# EAGLE board ads1298schield (EAGLE 7.2.0)

Size 160 x 100 mm. Coordinates in mm from the lower left corner, seen from the top.
Outline: 0,0 160,0 160,100 0,100 0,0
Copper layers (1*16): Top 0.035mm / dielectric 1.5mm / Bottom 0.035mm
Design rules "default": minimum track width 10mil, minimum drill 24mil, track to track 8mil, track to pad 8mil, pad to pad 8mil, via to via 8mil, smd to smd 8mil, copper to edge 40mil, drill to drill 8mil, minimum pad ring 10mil, minimum via ring 8mil, stop-mask expansion 4mil, vias tented up to drill 0mil, thermal gap 10mil

## Footprints (pad centres in the part's own frame; a part is rotated, then mirrored left to right if it is on the bottom)
C1608 = smd 1.1 x 1: 1 -0.85,0; 2 0.85,0
C0603 = smd 1.1 x 1: 1 -0.85,0; 2 0.85,0
0402-CAP = smd 0.7 x 0.9: 1 -0.65,0; 2 0.65,0
EIA3216 = smd 1.4 x 1.6: A 1.4,0; C -1.4,0
0603-CAP = smd 1.1 x 1: 1 -0.85,0; 2 0.85,0
1210 = smd 1.2 x 2: 1 -1.6,0; 2 1.6,0
C1210 = smd 1.6 x 2.7: 1 -1.4,0; 2 1.4,0
SOD323_ST = smd 0.8 x 0.6: A 1.25,0; C -1.25,0
MELF-MLL41 = smd 2.5 x 3: A 2.625,0; C -2.625,0
LED-0603 = smd 0.8 x 0.8: A 0,-0.75; C 0,0.75
SOT23-6-HAND = smd 2.591 x 0.559: 1 -1.651,1.016; 2 -1.651,0; 3 -1.651,-1.016; 4 1.651,-1.016; 5 1.651,0; 6 1.651,1.016
P-HVQFN48-7X7 = smd 0.8 x 0.35: 1 -3.325,2.75; 2 -3.325,2.25; 3 -3.325,1.75; 4 -3.325,1.25; 5 -3.325,0.75; 6 -3.325,0.25; 7 -3.325,-0.25; 8 -3.325,-0.75; 9 -3.325,-1.25; 10 -3.325,-1.75; 11 -3.325,-2.25; 12 -3.325,-2.75; 25 3.325,-2.75; 26 3.325,-2.25; 27 3.325,-1.75; 28 3.325,-1.25; 29 3.325,-0.75; 30 3.325,-0.25; 31 3.325,0.25; 32 3.325,0.75; 33 3.325,1.25; 34 3.325,1.75; 35 3.325,2.25; 36 3.325,2.75 | smd 0.35 x 0.8: 13 -2.75,-3.325; 14 -2.25,-3.325; 15 -1.75,-3.325; 16 -1.25,-3.325; 17 -0.75,-3.325; 18 -0.25,-3.325; 19 0.25,-3.325; 20 0.75,-3.325; 21 1.25,-3.325; 22 1.75,-3.325; 23 2.25,-3.325; 24 2.75,-3.325; 37 2.75,3.325; 38 2.25,3.325; 39 1.75,3.325; 40 1.25,3.325; 41 0.75,3.325; 42 0.25,3.325; 43 -0.25,3.325; 44 -0.75,3.325; 45 -1.25,3.325; 46 -1.75,3.325; 47 -2.25,3.325; 48 -2.75,3.325
22-23-2091 = drill 1 long: 1 -10.16,0; 2 -7.62,0; 3 -5.08,0; 4 -2.54,0; 5 0,0; 6 2.54,0; 7 5.08,0; 8 7.62,0; 9 10.16,0
JST-2-SMD = smd 1 x 4.6: 1 -1,-3.7; 2 1,-3.7 | smd 1.6 x 3.4: NC1 -3.4,1.5; NC2 3.4,1.5
2X12 = drill 1.016 pad 1.676 octagon: 1 -12.7,1.27; 2 -12.7,3.81; 3 -10.16,1.27; 4 -10.16,3.81; 5 -7.62,1.27; 6 -7.62,3.81; 7 -5.08,1.27; 8 -5.08,3.81; 9 -2.54,1.27; 10 -2.54,3.81; 11 0,1.27; 12 0,3.81; 13 2.54,1.27; 14 2.54,3.81; 15 5.08,1.27; 16 5.08,3.81; 17 7.62,1.27; 18 7.62,3.81; 19 10.16,1.27; 20 10.16,3.81; 21 12.7,1.27; 22 12.7,3.81; 23 15.24,1.27; 24 15.24,3.81
1X04 = drill 1.016 long: 1 -3.81,0; 2 -1.27,0; 3 1.27,0; 4 3.81,0
1210-HAND = smd 1.8 x 2.794: 1 -1.499,0; 2 1.499,0
TO252 = smd 1 x 1.6: 1 -2.28,-4.8; 2 2.28,-4.8 | smd 5.4 x 6.2: 3 0,2.5
1206-HAND = smd 1.8 x 1.803: 1 -1.499,0; 2 1.499,0
M1406 = smd 1.4 x 1.8: 1 -1.7,0; 2 1.7,0
0603-RES = smd 1.1 x 1: 1 -0.85,0; 2 0.85,0
0402-RES = smd 0.7 x 0.9: 1 -0.65,0; 2 0.65,0
SWITCH-TACT-B3U-1100P-B = smd 1 x 1.9: 1 -1.75,0; 2 1.75,0 | smd 0.8 x 1.1: BOSS 0,1.75 | hole 0.762: 0,0
SOT23-5 = smd 0.55 x 1.2: 1 -0.95,-1.3; 2 0,-1.3; 3 0.95,-1.3; 4 0.95,1.3; 5 -0.95,1.3
SOP50P490X110-10N = smd 1.397 x 0.279: 1 -2.184,0.991; 2 -2.184,0.508; 3 -2.184,0; 4 -2.184,-0.508; 5 -2.184,-0.991; 6 2.184,-0.991; 7 2.184,-0.508; 8 2.184,0; 9 2.184,0.508; 10 2.184,0.991
RN41 = smd 0.8 x 1.6: 1 -6.6,-6.6; 2 -5.4,-6.6; 3 -4.2,-6.6; 4 -3,-6.6; 5 -1.8,-6.6; 6 -0.6,-6.6; 7 0.6,-6.6; 8 1.8,-6.6; 9 3,-6.6; 10 4.2,-6.6; 11 5.4,-6.6; 12 6.6,-6.6; 13 6.6,6.6; 14 5.4,6.6; 15 4.2,6.6; 16 3,6.6; 17 1.8,6.6; 18 0.6,6.6; 19 -0.6,6.6; 20 -1.8,6.6; 21 -3,6.6; 22 -4.2,6.6; 23 -5.4,6.6; 24 -6.6,6.6 | smd 1.6 x 0.8: 28 9.4,3.1; 29 9.4,-3.1; 30 9.4,-4.122; 31 9.4,-1.9; 32 9.4,-0.7; 33 9.4,0.7; 34 9.4,1.9; 35 9.4,4.122
TQFP64 = smd 1.5 x 0.285: 1 -5.85,3.75; 2 -5.85,3.25; 3 -5.85,2.75; 4 -5.85,2.25; 5 -5.85,1.75; 6 -5.85,1.25; 7 -5.85,0.75; 8 -5.85,0.25; 9 -5.85,-0.25; 10 -5.85,-0.75; 11 -5.85,-1.25; 12 -5.85,-1.75; 13 -5.85,-2.25; 14 -5.85,-2.75; 15 -5.85,-3.25; 16 -5.85,-3.75; 33 5.85,-3.75; 34 5.85,-3.25; 35 5.85,-2.75; 36 5.85,-2.25; 37 5.85,-1.75; 38 5.85,-1.25; 39 5.85,-0.75; 40 5.85,-0.25; 41 5.85,0.25; 42 5.85,0.75; 43 5.85,1.25; 44 5.85,1.75; 45 5.85,2.25; 46 5.85,2.75; 47 5.85,3.25; 48 5.85,3.75 | smd 0.285 x 1.5: 17 -3.75,-5.85; 18 -3.25,-5.85; 19 -2.75,-5.85; 20 -2.25,-5.85; 21 -1.75,-5.85; 22 -1.25,-5.85; 23 -0.75,-5.85; 24 -0.25,-5.85; 25 0.25,-5.85; 26 0.75,-5.85; 27 1.25,-5.85; 28 1.75,-5.85; 29 2.25,-5.85; 30 2.75,-5.85; 31 3.25,-5.85; 32 3.75,-5.85; 49 3.75,5.85; 50 3.25,5.85; 51 2.75,5.85; 52 2.25,5.85; 53 1.75,5.85; 54 1.25,5.85; 55 0.75,5.85; 56 0.25,5.85; 57 -0.25,5.85; 58 -0.75,5.85; 59 -1.25,5.85; 60 -1.75,5.85; 61 -2.25,5.85; 62 -2.75,5.85; 63 -3.25,5.85; 64 -3.75,5.85
LQFP64 = smd 0.3 x 1.2: 1 -3.75,-5.75; 2 -3.25,-5.75; 3 -2.75,-5.75; 4 -2.25,-5.75; 5 -1.75,-5.75; 6 -1.25,-5.75; 7 -0.75,-5.75; 8 -0.25,-5.75; 9 0.25,-5.75; 10 0.75,-5.75; 11 1.25,-5.75; 12 1.75,-5.75; 13 2.25,-5.75; 14 2.75,-5.75; 15 3.25,-5.75; 16 3.75,-5.75; 33 3.75,5.75; 34 3.25,5.75; 35 2.75,5.75; 36 2.25,5.75; 37 1.75,5.75; 38 1.25,5.75; 39 0.75,5.75; 40 0.25,5.75; 41 -0.25,5.75; 42 -0.75,5.75; 43 -1.25,5.75; 44 -1.75,5.75; 45 -2.25,5.75; 46 -2.75,5.75; 47 -3.25,5.75; 48 -3.75,5.75 | smd 1.2 x 0.3: 17 5.75,-3.75; 18 5.75,-3.25; 19 5.75,-2.75; 20 5.75,-2.25; 21 5.75,-1.75; 22 5.75,-1.25; 23 5.75,-0.75; 24 5.75,-0.25; 25 5.75,0.25; 26 5.75,0.75; 27 5.75,1.25; 28 5.75,1.75; 29 5.75,2.25; 30 5.75,2.75; 31 5.75,3.25; 32 5.75,3.75; 49 -5.75,3.75; 50 -5.75,3.25; 51 -5.75,2.75; 52 -5.75,2.25; 53 -5.75,1.75; 54 -5.75,1.25; 55 -5.75,0.75; 56 -5.75,0.25; 57 -5.75,-0.25; 58 -5.75,-0.75; 59 -5.75,-1.25; 60 -5.75,-1.75; 61 -5.75,-2.25; 62 -5.75,-2.75; 63 -5.75,-3.25; 64 -5.75,-3.75
SOT23-5' = smd 0.5 x 1: 1 -0.95,-1.2; 2 0,-1.2; 3 0.95,-1.2; 4 0.95,1.2; 5 -0.95,1.2
SDBMF-009XXBXX2 = smd 1.2 x 4.3: 1 6.7,5.325; 2 4.2,5.325; 3 1.7,5.325; 4 -0.8,5.325; 5 -3.3,5.325; 6 -5.8,5.325; 7 -8.3,5.325; 8 -9.925,5.325 | smd 1.2 x 2: 9 9.2,4.175 | smd 2.1 x 2.4: M1 -13.4,-2 | smd 2.6 x 2.9: M2 13.4,-5.35 | smd 1.3 x 1.9: M3 -13.6,17.4; M4 13.8,16.95; M5 13.8,21.3 | smd 1.4 x 1.95: SW1 -11.9,22.7; SW3 -13.7,22.7 | smd 2.1 x 2.2: SW2 -13.4,-4.75 | hole 1.4: -11.9,0; 12.1,0
USB-MICROB = smd 0.35 x 1.4: D+ 0,2.65; D- -0.65,2.65; GND 1.3,2.65; ID 0.65,2.65; VBUS -1.3,2.65 | smd 1.8 x 1.9: MT1 -4,0; MT2 4,0
91SMX = smd 4.1 x 4.1: 1 -4,0; 2 4,0

## Placement (x,y rotation side)
C1  1uF  [C1608]  -31.75,96.52 0 top  (outside the outline)
C2  100nF  [C0603]  -26.67,96.52 0 top  (outside the outline)
C3  4.7uF  [0402-CAP]  -60.96,109.22 0 top  (outside the outline)
C4  4.7uF  [0402-CAP]  -64.77,109.22 0 top  (outside the outline)
C5  4.7uF  [EIA3216]  -45.72,95.25 0 top  (outside the outline)
C6  10uF  [EIA3216]  -52.07,95.25 0 top  (outside the outline)
C7  1uF  [0603-CAP]  -57.15,95.25 0 top  (outside the outline)
C8  0.1uF  [0603-CAP]  -60.96,95.25 0 top  (outside the outline)
C9  1uF  [0603-CAP]  -64.77,95.25 0 top  (outside the outline)
C10  0.1uF  [0603-CAP]  -68.58,95.25 0 top  (outside the outline)
C11  1uF  [0603-CAP]  -72.39,95.25 0 top  (outside the outline)
C12  0.1uF  [0603-CAP]  -76.2,95.25 0 top  (outside the outline)
C13  1uF  [0603-CAP]  -80.01,95.25 0 top  (outside the outline)
C14  0.1uF  [0603-CAP]  -83.82,95.25 0 top  (outside the outline)
C15  10uF  [1210]  -85.09,109.22 0 top  (outside the outline)
C16  1.5nF  [1210]  -90.17,109.22 0 top  (outside the outline)
C17  100uF  [1210]  -15.24,113.03 0 top  (outside the outline)
C18  1uF  [0603-CAP]  -87.63,95.25 0 top  (outside the outline)
C19  1uF  [0603-CAP]  -91.44,95.25 0 top  (outside the outline)
C20  0.1uF  [0603-CAP]  -15.24,101.6 0 top  (outside the outline)
C21  1uF  [0603-CAP]  -19.05,101.6 0 top  (outside the outline)
C22  1uF  [0603-CAP]  -22.86,101.6 0 top  (outside the outline)
C23  1uF  [0603-CAP]  -26.67,101.6 0 top  (outside the outline)
C24  22uF  [1210]  -20.32,113.03 0 top  (outside the outline)
C25  100uF  [1210]  -25.4,113.03 0 top  (outside the outline)
C26  100nF  [C1210]  -78.74,73.66 0 top  (outside the outline)
C27  1uF  [0402-CAP]  -68.58,109.22 0 top  (outside the outline)
C28  10uF  [0603-CAP]  -30.48,101.6 0 top  (outside the outline)
C29  1uF  [0603-CAP]  -34.29,101.6 0 top  (outside the outline)
C30  1uF  [0603-CAP]  -38.1,101.6 0 top  (outside the outline)
C31  220pF  [0603-CAP]  -41.91,101.6 0 top  (outside the outline)
C32  10uF  [0603-CAP]  -45.72,101.6 0 top  (outside the outline)
C33  4.7pF  [0603-CAP]  -49.53,101.6 0 top  (outside the outline)
C34  4.7nF  [0603-CAP]  -53.34,101.6 0 top  (outside the outline)
C35  4.7nF  [0603-CAP]  -57.15,101.6 0 top  (outside the outline)
C36  4.7nF  [0603-CAP]  -60.96,101.6 0 top  (outside the outline)
C37  4.7nF  [0603-CAP]  -64.77,101.6 0 top  (outside the outline)
C38  4.7nF  [0603-CAP]  -68.58,101.6 0 top  (outside the outline)
C39  4.7nF  [0603-CAP]  -72.39,101.6 0 top  (outside the outline)
C40  4.7nF  [0603-CAP]  -76.2,101.6 0 top  (outside the outline)
C41  4.7nF  [0603-CAP]  -80.01,101.6 0 top  (outside the outline)
C42  4.7nF  [0603-CAP]  -83.82,101.6 0 top  (outside the outline)
C43  4.7nF  [0603-CAP]  -87.63,101.6 0 top  (outside the outline)
C44  4.7nF  [0603-CAP]  -91.44,101.6 0 top  (outside the outline)
C45  4.7nF  [0603-CAP]  -15.24,105.41 0 top  (outside the outline)
C46  4.7nF  [0603-CAP]  -19.05,105.41 0 top  (outside the outline)
C47  4.7nF  [0603-CAP]  -22.86,105.41 0 top  (outside the outline)
C48  4.7nF  [0603-CAP]  -26.67,105.41 0 top  (outside the outline)
C49  4.7nF  [0603-CAP]  -30.48,105.41 0 top  (outside the outline)
C50  4.7pF  [0603-CAP]  -34.29,105.41 0 top  (outside the outline)
C51  1uF  [0603-CAP]  -38.1,105.41 0 top  (outside the outline)
C52  1uF  [0603-CAP]  -41.91,105.41 0 top  (outside the outline)
C53  1uF  [0603-CAP]  -45.72,105.41 0 top  (outside the outline)
C58  100nF  [C1210]  -85.09,73.66 0 top  (outside the outline)
C59  100nF  [C1210]  -91.44,73.66 0 top  (outside the outline)
C60  100nF  [C1210]  -16.51,82.55 0 top  (outside the outline)
C61  4.7uF  [C1210]  -29.21,82.55 0 top  (outside the outline)
C62  4.7nF  [0603-CAP]  -49.53,105.41 0 top  (outside the outline)
C63  0.1uF  [0603-CAP]  -53.34,105.41 0 top  (outside the outline)
C64  100nF  [C1210]  -22.86,82.55 0 top  (outside the outline)
C66  0.01uF  [0603-CAP]  -57.15,105.41 0 top  (outside the outline)
D1  BAT60J  [SOD323_ST]  -19.05,96.52 0 top  (outside the outline)
D2  0  [MELF-MLL41]  -74.93,82.55 0 top  (outside the outline)
D4  red  [LED-0603]  -30.48,113.03 0 top  (outside the outline)
IC1  MCP1640SOT23-6-HAND  [SOT23-6-HAND]  -31.75,73.66 0 top  (outside the outline)
IC2  ADS1258  [P-HVQFN48-7X7]  -49.53,49.53 0 top  (outside the outline)
J1  22-23-2091  [22-23-2091]  -66.04,49.53 0 top  (outside the outline)
JP1  LiPo  [JST-2-SMD]  -76.2,64.77 0 top  (outside the outline)
JP16  Electrodes  [2X12]  -57.15,60.96 0 top  (outside the outline)
JP58  SWD header  [1X04]  -38.1,82.55 0 top  (outside the outline)
L1  4.7uH  [1210-HAND]  -57.15,82.55 0 top  (outside the outline)
L2  4.7uH  [1210-HAND]  -62.23,82.55 0 top  (outside the outline)
L3  6.8uH  [1210-HAND]  -67.31,82.55 0 top  (outside the outline)
Q1  FDD4141TO252  [TO252]  -48.26,6.35 0 top  (outside the outline)
R1  309k  [1206-HAND]  -67.31,90.17 0 top  (outside the outline)
R2  10k  [M1406]  -88.9,82.55 0 top  (outside the outline)
R3  10k  [M1406]  -16.51,90.17 0 top  (outside the outline)
R4  10k  [M1406]  -22.86,90.17 0 top  (outside the outline)
R5  10k  [M1406]  -29.21,90.17 0 top  (outside the outline)
R6  3.98K  [0603-RES]  -60.96,105.41 0 top  (outside the outline)
R7  10k  [M1406]  -35.56,90.17 0 top  (outside the outline)
R8  10k  [M1406]  -41.91,90.17 0 top  (outside the outline)
R9  10k  [M1406]  -48.26,90.17 0 top  (outside the outline)
R10  10k  [M1406]  -54.61,90.17 0 top  (outside the outline)
R11  470  [0402-RES]  -72.39,109.22 0 top  (outside the outline)
R12  2k  [0402-RES]  -76.2,109.22 0 top  (outside the outline)
R13  976k  [1206-HAND]  -72.39,90.17 0 top  (outside the outline)
R14  309k  [1206-HAND]  -77.47,90.17 0 top  (outside the outline)
R15  340k  [1206-HAND]  -82.55,90.17 0 top  (outside the outline)
R16  200k  [1206-HAND]  -87.63,90.17 0 top  (outside the outline)
R17  15k  [1206-HAND]  -92.71,90.17 0 top  (outside the outline)
R18  2k  [0402-RES]  -80.01,109.22 0 top  (outside the outline)
R19  1M  [0603-RES]  -64.77,105.41 0 top  (outside the outline)
R20  86.6k  [0603-RES]  -68.58,105.41 0 top  (outside the outline)
R21  10.2k  [0603-RES]  -72.39,105.41 0 top  (outside the outline)
R25  4.99k  [0603-RES]  -76.2,105.41 0 top  (outside the outline)
R27  10k  [M1406]  -60.96,90.17 0 top  (outside the outline)
R28  100k  [M1406]  -82.55,82.55 0 top  (outside the outline)
R34  4.99k  [0603-RES]  -80.01,105.41 0 top  (outside the outline)
R35  4.99k  [0603-RES]  -83.82,105.41 0 top  (outside the outline)
R36  4.99k  [0603-RES]  -87.63,105.41 0 top  (outside the outline)
R37  4.99k  [0603-RES]  -91.44,105.41 0 top  (outside the outline)
R38  4.99k  [0603-RES]  -15.24,109.22 0 top  (outside the outline)
R39  4.99k  [0603-RES]  -19.05,109.22 0 top  (outside the outline)
R40  4.99k  [0603-RES]  -22.86,109.22 0 top  (outside the outline)
R41  4.99k  [0603-RES]  -26.67,109.22 0 top  (outside the outline)
R42  4.99k  [0603-RES]  -30.48,109.22 0 top  (outside the outline)
R43  4.99k  [0603-RES]  -34.29,109.22 0 top  (outside the outline)
R44  4.99k  [0603-RES]  -38.1,109.22 0 top  (outside the outline)
R45  4.99k  [0603-RES]  -41.91,109.22 0 top  (outside the outline)
R46  4.99k  [0603-RES]  -45.72,109.22 0 top  (outside the outline)
R47  4.99k  [0603-RES]  -49.53,109.22 0 top  (outside the outline)
R48  4.99k  [0603-RES]  -53.34,109.22 0 top  (outside the outline)
R49  4.99k  [0603-RES]  -57.15,109.22 0 top  (outside the outline)
SW3  !RST  [SWITCH-TACT-B3U-1100P-B]  -40.64,95.25 0 top  (outside the outline)
U1  MCP73831  [SOT23-5]  -35.56,95.25 0 top  (outside the outline)
U2  LTC3440EMSPBF  [SOP50P490X110-10N]  -35.56,63.5 0 top  (outside the outline)
U$1  BLUETOOTH-RN41"  [RN41]  -64.77,7.62 0 top  (outside the outline)
U$2  ADS1298*PAG*  [TQFP64]  -20.32,50.8 0 top  (outside the outline)
U$3  STM32F411RE  [LQFP64]  -38.1,50.8 0 top  (outside the outline)
U$4  LMR62421  [SOT23-5']  -72.39,73.66 0 top  (outside the outline)
X1  SDBMF  [SDBMF-009XXBXX2]  -27.94,17.78 0 top  (outside the outline)
X2  USB-MICROB  [USB-MICROB]  -49.53,82.55 0 top  (outside the outline)
X3  CRYSTALS-NOGND-91SMX  [91SMX]  -57.15,73.66 0 top  (outside the outline)

## Library data of the parts
C1 C2 C26 C58-C61 C64 R2-R5 R7-R10 = rcl
C3 C4 C27 D4 JP1 R11 R12 R18 U1 U$1 X2 = SparkFun
C5 C6 IC1 L1-L3 R1 R13-R17 = SteveMarple
C7-C25 C28-C53 C62 C63 C66 R6 R19-R21 R25 R34-R49 = SparkFun-Passives
D1 D2 = diode
IC2 = mfePCB
J1 = con-molex; MF: MOLEX; MPN: 22-23-2091; OC_FARNELL: 1756827; OC_NEWARK: 56H0450
JP16 = headers
JP58 = pinhead
Q1 = transistor-fet
R27 R28 = resistor
SW3 = stm32f4stamp
U2 = LTC; MPN: LTC3440EMS#PBF; OC_FARNELL: 1273938; OC_NEWARK: 73K4393; PACKAGE: MSOP-10; SUPPLIER: Linear Technology
U$2 = ADS129x
U$3 = micro-stm_v3
U$4 = mfePCB; MPN: LMR62421
X1 = farnell
X3 = IQD-Frequency-Products

## Nets
5VIN: C3.1 D1.A D4.A Q1.1 R18.1 U1.4 X2.VBUS
4630ACCX: IC2.4 J1.4
4630ACCY: IC2.3 J1.5
4630ACCZ: IC2.2 J1.6
!DRDY1258: IC2.25 U$3.34
!DRDY1298: U$2.47 U$3.38
!PWDN1258: IC2.10 U$3.24
!PWDN1298: U$2.35 U$3.57
!RESET1258: IC2.11 U$3.36
!RESET1298: U$2.36 U$3.58
!SPI_CS1258: IC2.27 U$3.33
!SPI_CS1298: U$2.39 U$3.20
+3V3: C1.1 C2.1 C13.1 C14.1 C24.1 C25.1 C26.1 C52.1 C58.1 C59.1 C60.1 C63.1 IC2.28 JP58.1 R2.1 R3.1 R4.1 R5.1 R7.1 R8.1 R9.1 R10.1 R15.2 R28.2 U2.6 U$1.11 U$2.48 U$2.50 U$3.1 U$3.19 U$3.32 U$3.48 U$3.64 X1.4
+5V: C6.A C7.1 C8.1 C9.1 C10.1 C11.1 C12.1 C51.1 IC1.5 IC2.6 R13.2 U$2.19 U$2.21 U$2.22 U$2.54 U$2.56 U$2.59 U$2.60
+12V: C28.1 C31.1 D2.C J1.1 J1.2 J1.3 R20.2
AGND: C2.2 C3.2 C4.2 C5.C C6.C C7.2 C8.2 C9.2 C10.2 C11.2 C12.2 C13.2 C14.2 C15.2 C17.2 C18.2 C19.2 C20.2 C21.2 C22.2 C23.2 C24.2 C25.2 C26.2 C27.2 C28.2 C29.1 C29.2 C30.1 C30.2 C32.2 C33.2 C34.2 C35.1 C36.2 C37.1 C38.2 C39.1 C40.2 C41.1 C42.2 C43.1 C44.2 C45.1 C46.2 C47.1 C48.2 C49.1 C50.2 C51.2 C52.2 C53.2 C58.2 C59.2 C60.2 C61.2 C62.2 C63.2 C64.2 IC1.2 IC2.5 IC2.29 IC2.30 IC2.32 J1.7 J1.8 J1.9 JP1.2 JP16.5 JP58.2 R1.1 R12.2 R14.1 R16.1 R18.2 R21.1 R27.1 SW3.2 U1.2 U2.5 U$1.1 U$1.4 U$1.12 U$1.28 U$1.29 U$2.20 U$2.23 U$2.25 U$2.31 U$2.32 U$2.33 U$2.41 U$2.49 U$2.51 U$2.53 U$2.57 U$2.58 U$3.12 U$3.18 U$3.28 U$3.31 U$3.47 U$3.63 U$4.2 X1.3 X1.6 X2.GND
AIN1N: C35.2 R35.2 U$2.15
AIN1P: C34.1 R34.2 U$2.16
AIN2N: C37.2 R37.2 U$2.13
AIN2P: C36.1 R36.2 U$2.14
AIN3N: C39.2 R39.2 U$2.11
AIN3P: C38.1 R38.2 U$2.12
AIN4N: C41.2 R41.2 U$2.9
AIN4P: C40.1 R40.2 U$2.10
AIN5N: C43.2 R43.2 U$2.7
AIN5P: C42.1 R42.2 U$2.8
AIN6N: C45.2 R45.2 U$2.5
AIN6P: C44.1 R44.2 U$2.6
AIN7N: C47.2 R47.2 U$2.3
AIN7P: C46.1 R46.2 U$2.4
AIN8N: C49.2 R49.2 U$2.1
AIN8P: C48.1 R48.2 U$2.2
BIASINV: C66.2 JP16.3 R6.1 U$2.61
CLKSEL1258: IC2.12 U$3.39
CLKSEL1298: U$2.52 U$3.59
CMD: R9.2 X1.2
D0: R2.2 X1.7
IN1N: JP16.8 R35.1
IN1P: JP16.7 R34.1
IN2N: JP16.10 R37.1
IN2P: JP16.9 R36.1
IN3N: JP16.12 R39.1
IN3P: JP16.11 R38.1
IN4N: JP16.14 R41.1
IN4P: JP16.13 R40.1
IN5N: JP16.16 R43.1
IN5P: JP16.15 R42.1
IN6N: JP16.18 R45.1
IN6P: JP16.17 R44.1
IN7N: JP16.20 R47.1
IN7P: JP16.19 R46.1
IN8N: JP16.22 R49.1
IN8P: JP16.21 R48.1
LINK: U$1.15 U$1.16
N$1: R3.2 X1.1
N$2: R4.2 X1.8
N$3: C17.1 U$2.28
N$4: C18.1 U$2.30
N$5: C66.1 R6.2 U$2.62 U$2.63
N$6: R5.2 X1.9
N$7: R19.1 U$4.4
N$8: C21.1 U$2.26
N$9: R7.2 X1.SW1
N$10: R8.2 X1.SW2
N$11: C1.2 X1.SW3
N$12: C33.1 IC2.8 X3.2
N$13: C19.1 C20.1 U$2.55
N$14: D2.A L3.1 U$4.1
N$15: C50.1 IC2.9 X3.1
N$16: R12.1 U1.5
N$17: R11.1 U1.1
N$18: C31.2 R20.1 R21.2 U$4.3
N$19: R1.2 U2.1
N$20: D4.C R11.2
N$21: IC1.1 L1.2
N$23: C5.A IC1.3 IC1.6 L1.1
N$24: C16.1 U2.10
N$26: IC1.4 R13.1 R14.2
N$27: C15.1 U2.2 U2.7 U2.8
N$28: L2.1 U2.3
N$29: L2.2 U2.4
N$30: C53.1 IC2.31
N$31: R15.1 R16.2 R17.1 U2.9
N$32: C16.2 R17.2
N$87: C61.1 U$3.30
N$98: R27.2 U$3.60
N$99: C64.1 U$3.13
N$100: R28.1 SW3.1 U$3.7
REF_ELEC: C62.1 R25.1
REF_ELEC_CON: JP16.23 R25.2
RESET42: U$1.5 U$3.41
RX-TX42: U$1.14 U$3.43
SCK: R10.2 X1.5
SPI_CLK1258: IC2.22 U$3.29
SPI_CLK1298: U$2.40 U$3.21
SPI_MISO1258: IC2.24 U$3.10
SPI_MISO1298: U$2.43 U$3.22
SPI_MOSI1258: IC2.23 U$3.11
SPI_MOSI1298: U$2.34 U$3.23
START1258: IC2.26 U$3.35
START1298: U$2.38 U$3.37
SWCLK: JP58.3 U$3.49
SWDIO: JP58.4 U$3.46
TX-RX42: U$1.13 U$3.42
VBAT: C4.1 C27.1 C32.1 D1.C JP1.1 L3.2 Q1.2 Q1.3 R19.2 U1.3 U$4.5
VREFP: C22.1 C23.1 U$2.24

## Tracks (layer width: path | path; a pad name or v marks a point on that pad's centre or on a via)
5VIN  (6 unrouted)
4630ACCX  (1 unrouted)
4630ACCY  (1 unrouted)
4630ACCZ  (1 unrouted)
!DRDY1258  (1 unrouted)
!DRDY1298  (1 unrouted)
!PWDN1258  (1 unrouted)
!PWDN1298  (1 unrouted)
!RESET1258  (1 unrouted)
!RESET1298  (1 unrouted)
!SPI_CS1258  (1 unrouted)
!SPI_CS1298  (1 unrouted)
+3V3  (33 unrouted)
+5V  (17 unrouted)
+12V  (6 unrouted)
AGND  (106 unrouted)
AIN1N  (2 unrouted)
AIN1P  (2 unrouted)
AIN2N  (2 unrouted)
AIN2P  (2 unrouted)
AIN3N  (2 unrouted)
AIN3P  (2 unrouted)
AIN4N  (2 unrouted)
AIN4P  (2 unrouted)
AIN5N  (2 unrouted)
AIN5P  (2 unrouted)
AIN6N  (2 unrouted)
AIN6P  (2 unrouted)
AIN7N  (2 unrouted)
AIN7P  (2 unrouted)
AIN8N  (2 unrouted)
AIN8P  (2 unrouted)
BIASINV  (3 unrouted)
CLKSEL1258  (1 unrouted)
CLKSEL1298  (1 unrouted)
CMD  (1 unrouted)
D0  (1 unrouted)
IN1N  (1 unrouted)
IN1P  (1 unrouted)
IN2N  (1 unrouted)
IN2P  (1 unrouted)
IN3N  (1 unrouted)
IN3P  (1 unrouted)
IN4N  (1 unrouted)
IN4P  (1 unrouted)
IN5N  (1 unrouted)
IN5P  (1 unrouted)
IN6N  (1 unrouted)
IN6P  (1 unrouted)
IN7N  (1 unrouted)
IN7P  (1 unrouted)
IN8N  (1 unrouted)
IN8P  (1 unrouted)
LINK  (1 unrouted)
N$1  (1 unrouted)
N$2  (1 unrouted)
N$3  (1 unrouted)
N$4  (1 unrouted)
N$5  (3 unrouted)
N$6  (1 unrouted)
N$7  (1 unrouted)
N$8  (1 unrouted)
N$9  (1 unrouted)
N$10  (1 unrouted)
N$11  (1 unrouted)
N$12  (2 unrouted)
N$13  (2 unrouted)
N$14  (2 unrouted)
N$15  (2 unrouted)
N$16  (1 unrouted)
N$17  (1 unrouted)
N$18  (3 unrouted)
N$19  (1 unrouted)
N$20  (1 unrouted)
N$21  (1 unrouted)
N$23  (3 unrouted)
N$24  (1 unrouted)
N$26  (2 unrouted)
N$27  (3 unrouted)
N$28  (1 unrouted)
N$29  (1 unrouted)
N$30  (1 unrouted)
N$31  (3 unrouted)
N$32  (1 unrouted)
N$87  (1 unrouted)
N$98  (1 unrouted)
N$99  (1 unrouted)
N$100  (2 unrouted)
REF_ELEC  (1 unrouted)
REF_ELEC_CON  (1 unrouted)
RESET42  (1 unrouted)
RX-TX42  (1 unrouted)
SCK  (1 unrouted)
SPI_CLK1258  (1 unrouted)
SPI_CLK1298  (1 unrouted)
SPI_MISO1258  (1 unrouted)
SPI_MISO1298  (1 unrouted)
SPI_MOSI1258  (1 unrouted)
SPI_MOSI1298  (1 unrouted)
START1258  (1 unrouted)
START1298  (1 unrouted)
SWCLK  (1 unrouted)
SWDIO  (1 unrouted)
TX-RX42  (1 unrouted)
VBAT  (10 unrouted)
VREFP  (2 unrouted)